# Altium PCB PCB1.PcbDoc
Units mm, origin at the board's own origin, x right, y up, seen from the top; angles counter-clockwise.
Board outline 40.08 x 17.47 mm, 2 copper layers (Top Layer, Bottom Layer); 10 components, 17 nets, 82 pads, 42 vias.
Unrouted connection lines stored in the file: 19.
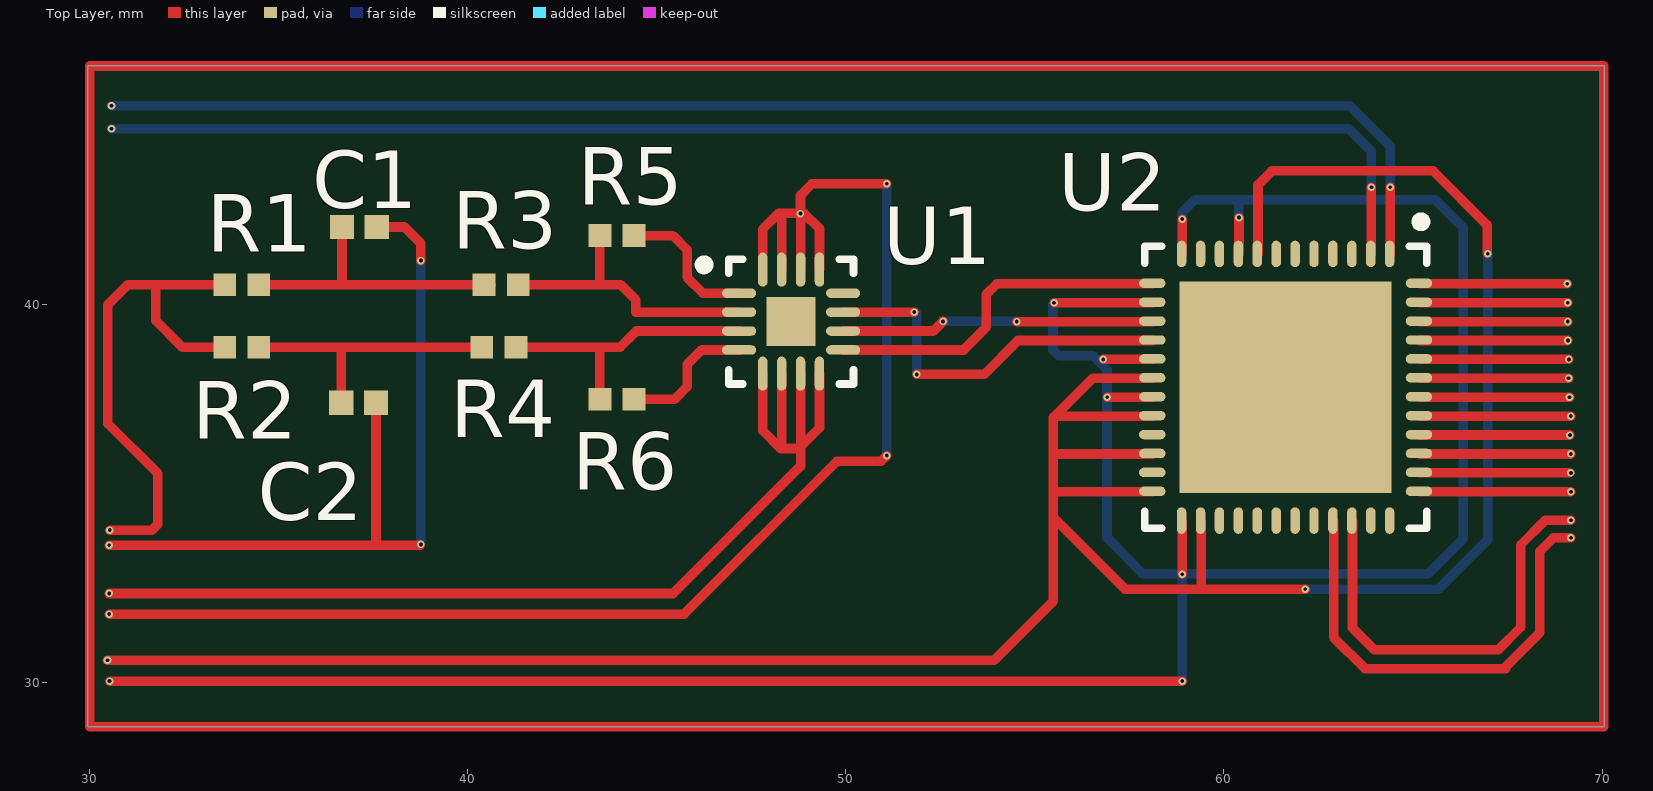
[diagram p0: Top Layer view]
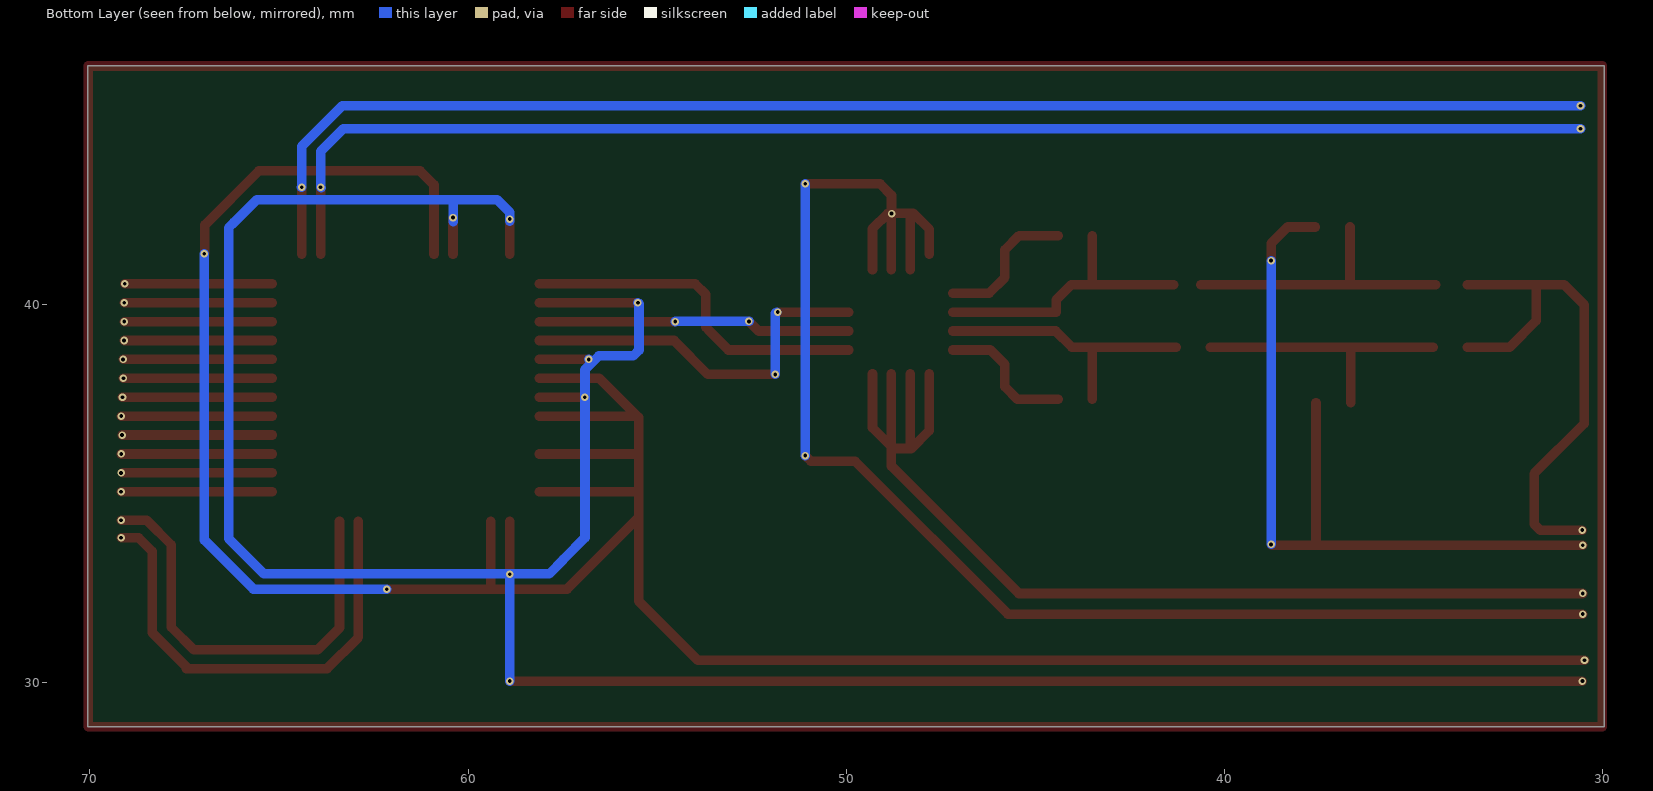
[diagram p1: Bottom Layer view, seen from below]

## Layer stack, top to bottom
Top Solder: solder mask 0.0102, Solder Resist, Dk 3.5
Top Layer: signal copper 0.0356
Dielectric 1: dielectric 0.32, FR-4, Dk 4.8
Bottom Layer: signal copper 0.0356
Bottom Solder: solder mask 0.0102, Solder Resist, Dk 3.5

## Board outline
29.972,28.829 29.972,46.295 70.052,46.295 70.052,28.829

## Design rules (kind name [scope] priority, off if disabled: settings)
Clearance [All] p1: gap=0.254 ignorepadtopadclearanceinfootprint=FALSE
PolygonConnect [All] p1: connectstyle=Relief reliefconductorwidth=0.254 reliefentries=4 polygonreliefangle="90 Angle" airgapwidth=0.254
RoutingVias [All] p1: holewidth=0.711 width=1.27 viastyle="Through Hole" minholewidth=0.711 minwidth=1.27 maxholewidth=0.711 maxwidth=1.27
SolderMaskExpansion [All] p1: expansion=0.102 istentingtop=FALSE
SupplyNets "Schematic Supply Nets_1" [InNet('GND')] p1: voltage=0.000
Width [All] p1: maxlimit=0.254 minlimit=0.254 preferedwidth=0.254
30 further rules are at their usual default settings.

## Classes and differential pairs
component class Sheet2: C1 C2 R1 R2 R3 R4 R5 R6

## Components (designator, comment, footprint, x,y, rotation, side; value= is the part's Value field where it differs from the comment)
C1 "0.1" CAP 37.149,42.038 r0 top
C2 "0.1" CAP 37.127,37.393 r0 top
R1 "50" RES 34.036,40.513 r0 top
R2 "160" RES 34.036,38.862 r0 top
R3 "20k" RES 40.894,40.513 r0 top
R4 "20k" RES 40.836,38.862 r0 top
R5 "10k" RES 43.956,41.81 r0 top
R6 "10k" RES 43.956,37.482 r0 top
U2 "U2" ADS61B49 61.634,37.8 r270 top (schematic designator *3)
? "U1" ADA4932-1 48.561,39.537 r0 top

## Footprints (in the part's own frame and the unit in brackets; to place one, negate y for a bottom-side part, rotate by r counter-clockwise, add the part's x,y. Pads: shape width x height; smd on the part's side, far side on the other; paste and mask are expansions set on the pad)
ADA4932-1 [mm] "QFN, 16-Leads, Body 3,00x3,00mm, Pitch 0,50mm, Thermal Pad 1,50x1,50mm, IPC Medium Density"
  oval 0.9x0.25 smd: 1(-1.375,0.75) 2(-1.375,0.25) 3(-1.375,-0.25) 4(-1.375,-0.75) 9(1.375,-0.75) 10(1.375,-0.25) 11(1.375,0.25) 12(1.375,0.75)
  oval 0.25x0.9 smd: 5(-0.75,-1.375) 6(-0.25,-1.375) 7(0.25,-1.375) 8(0.75,-1.375) 13(0.75,1.375) 14(0.25,1.375) 15(-0.25,1.375) 16(-0.75,1.375)
  rect 1.3x1.3 smd: 17(0,0)
  silkscreen extent -2.42,-1.65 1.65,1.65, body extent -1.64,-1.52 1.4,1.52, height 1
ADS61B49 [mm]
  oval 0.7x0.25 smd: 1(-3.525,2.75) 2(-3.525,2.25) 3(-3.525,1.75) 4(-3.525,1.25) 5(-3.525,0.75) 6(-3.525,0.25) 7(-3.525,-0.25) 8(-3.525,-0.75) 9(-3.525,-1.25) 10(-3.525,-1.75) 11(-3.525,-2.25) 12(-3.525,-2.75) 25(3.525,-2.75) 26(3.525,-2.25) 27(3.525,-1.75) 28(3.525,-1.25) 29(3.525,-0.75) 30(3.525,-0.25) 31(3.525,0.25) 32(3.525,0.75) 33(3.525,1.25) 34(3.525,1.75) 35(3.525,2.25) 36(3.525,2.75)
  oval 0.25x0.7 smd: 13(-2.75,-3.525) 14(-2.25,-3.525) 15(-1.75,-3.525) 16(-1.25,-3.525) 17(-0.75,-3.525) 18(-0.25,-3.525) 19(0.25,-3.525) 20(0.75,-3.525) 21(1.25,-3.525) 22(1.75,-3.525) 23(2.25,-3.525) 24(2.75,-3.525) 37(2.75,3.525) 38(2.25,3.525) 39(1.75,3.525) 40(1.25,3.525) 41(0.75,3.525) 42(0.25,3.525) 43(-0.25,3.525) 44(-0.75,3.525) 45(-1.25,3.525) 46(-1.75,3.525) 47(-2.25,3.525) 48(-2.75,3.525)
  rect 5.6x5.6 smd: 49(0,0)
  silkscreen extent -4.5,-3.73 3.73,3.72, body extent -3.62,-3.62 3.62,3.62, height 1
CAP [mm] "Chip Capacitor, 2-Leads, Body 1,00x0,50mm, IPC Medium Density"
  rect 0.64x0.64 smd: 1(-0.46,0) 2(0.46,0)
  body extent -0.55,-0.3 0.55,0.3, height 0.6
RES [mm] "Chip Resistor, 2-Leads, Body 1,00x0,50mm, IPC Medium Density"
  rect 0.6x0.6 smd: 1(-0.45,0) 2(0.45,0)
  body extent -0.55,-0.3 0.55,0.3, height 0.6

## Part data
C1 C2: library part C
R1 R2 R3 R4 R5 R6: library part R
U2: library part ADC
?: library part OA

## Via types
v1: diameter 0.2/0.2 (per signal layer), hole 0.1, Top Layer to Bottom Layer, 22 vias
v2: diameter 0.2, hole 0.1, Top Layer to Bottom Layer, 20 vias

## Nets (pads, with @x,y where several pads share a name; then routed paths per layer and width w, separated by ;. In a path a pad name is that pad's centre, name@x,y a point inside that pad or via, vN(x,y) a via of type N, cw(c..) or ccw(c..) an arc to the next point about the centre after c; other vN are vias at no path point)
GND: 
Net*3_1: U2.1
Net*3_2: U2.2
Net*3_8: U2.8 U2.18 U2.20 U2.22 U2.24 U2.26
Net*3_9: U2.9 U2.12 U2.14 U2.17 U2.19 U2.25
Net*3_13: ?.9 U2.13
Net*3_15: ?.10 U2.15
Net*3_16: ?.11 U2.16
Net_1: ?.1
Net_2: ?.2
Net_3: ?.3
Net_4: ?.4
Net_5: ?.5 ?.6 ?.7 ?.8
Net_13: ?.13 ?.14 ?.15 ?.16
NetC1: 
NetC2: 
NetR1: 
pads on no net: ?.12 ?.17 C1.1 C1.2 C2.1 C2.2 R1.1 R1.2 R2.1 R2.2 R3.1 R3.2 R4.1 R4.2 R5.1 R5.2 R6.1 R6.2 U2.3 U2.4 U2.5 U2.6 U2.7 U2.10 U2.11 U2.21 U2.23 U2.27 U2.28 U2.29 U2.30 U2.31 U2.32 U2.33 U2.34 U2.35 U2.36 U2.37 U2.38 U2.39 U2.40 U2.41 U2.42 U2.43 U2.44 U2.45 U2.46 U2.47 U2.48 U2.49
copper on no net: | length 575.6
  Top Layer w0.254: v1(30.489,30.586) 53.934,30.586 55.494,32.146 55.494,34.357 ; v1(30.533,31.803) 45.732,31.803 49.773,35.844 50.943,35.844 v2(51.092,35.993) ; v1(30.533,32.349) 45.441,32.349 48.811,35.719 48.811,36.23 48.811,38.162 ; v1(30.536,33.625) 37.587,33.625 ; v1(30.543,30.032) v2(58.901,30.032) ; v1(30.547,34.025) 31.662,34.025 31.818,34.18 31.818,35.519 30.5,36.836 30.5,39.983 31.029,40.512 31.766,40.512 ; 33.585,40.512 31.766,40.512 ; 33.586,38.862 32.462,38.862 31.766,39.559 31.766,40.512 ; 34.417,40.513 40.629,40.513 ; 34.486,38.862 40.386,38.862 ; 36.667,37.393 36.667,38.843 ; 36.689,40.534 36.689,42.038 ; 37.587,37.393 37.587,33.625 ; 37.609,42.038 38.338,42.038 38.773,41.603 v2(38.773,41.149) ; v2@38.752,33.625 37.587,33.625 ; 41.286,38.862 43.473,38.862 44.043,38.862 44.468,39.287 47.186,39.287 ; 41.344,40.513 43.417,40.513 43.724,40.513 ; 43.506,37.482 43.506,38.829 ; 43.506,40.578 43.506,41.81 ; 43.571,40.513 43.724,40.513 ; 44.406,37.482 45.478,37.482 45.81,37.814 45.81,38.401 46.195,38.787 47.186,38.787 ; 44.406,41.81 45.435,41.81 45.81,41.435 45.81,40.708 46.231,40.287 47.186,40.287 ; 47.186,39.787 44.451,39.787 44.451,40.117 44.055,40.513 43.724,40.513 ; 47.811,38.162 47.811,36.654 48.284,36.181 48.761,36.181 49.311,36.73 49.311,38.162 ; 47.811,41.317 47.811,41.979 48.232,42.4 48.903,42.4 49.311,41.992 49.311,40.912 ; 48.311,36.207 48.311,38.162 ; 48.311,40.912 48.311,42.349 ; v2(48.808,42.392) 48.808,42.875 49.112,43.18 v2(51.086,43.18) ; 48.811,40.912 v2@48.811,42.327 ; 49.936,38.787 50.935,38.787 53.121,38.787 53.657,39.323 ; 49.936,39.287 50.915,39.287 52.322,39.287 v2(52.577,39.542) ; 49.936,39.787 50.915,39.787 v2(51.817,39.787) ; v2(51.881,38.14) 53.667,38.14 54.551,39.023 54.551,39.038 57.28,39.038 58.126,39.038 ; 53.723,39.389 53.723,40.261 53.999,40.538 57.207,40.538 57.317,40.538 58.126,40.538 ; v2(54.524,39.538) 57.317,39.538 58.126,39.538 ; 55.494,35.038 56.514,35.038 57.291,35.038 58.126,35.038 ; 55.494,36.038 56.531,36.038 57.291,36.038 58.126,36.038 ; v2(55.514,40.038) 57.317,40.038 58.126,40.038 ; 55.531,37.038 56.531,37.038 57.291,37.038 58.126,37.038 ; v2(56.815,38.538) 57.28,38.538 58.126,38.538 ; v2(56.916,37.538) 57.291,37.538 58.126,37.538 ; 57.401,32.462 57.389,32.462 ; 58.126,38.038 57.291,38.038 56.531,38.038 55.494,37.001 55.494,34.357 ; v2(58.901,32.858) 58.901,33.448 58.901,34.263 ; 58.901,41.313 v2(58.901,42.246) ; 59.401,34.263 59.401,33.448 59.401,32.462 ; 60.401,41.313 v2(60.401,42.286) ; 60.903,41.314 60.903,42.594 60.903,43.153 61.273,43.523 65.541,43.523 65.541,43.512 66.96,42.092 v2@66.96,41.349 ; v2(62.152,32.462) 59.401,32.462 ; 62.901,34.263 62.901,31.189 63.73,30.361 67.226,30.361 67.445,30.361 67.445,30.407 68.357,31.318 68.357,33.465 68.715,33.822 v1(69.177,33.822) ; 63.401,34.263 63.401,31.439 63.984,30.857 67.249,30.857 67.849,31.457 67.849,33.638 68.496,34.284 v1(69.177,34.284) ; 63.901,41.313 63.901,42.112 v2(63.901,43.091) ; 64.401,41.313 64.401,42.112 v2(64.401,43.091) ; 65.176,35.038 v1(69.177,35.038) ; 65.176,35.538 v1@69.135,35.538 ; 65.176,36.038 v1(69.173,36.038) ; 65.176,36.538 v1(69.15,36.538) ; 65.176,37.038 v1(69.171,37.038) ; 65.176,37.538 v1(69.139,37.538) ; 65.176,38.038 v1(69.115,38.038) ; 65.176,38.538 v1(69.123,38.538) ; 65.176,39.038 v1(69.096,39.038) ; 65.176,39.538 v1(69.091,39.538) ; 65.176,40.038 v1(69.091,40.038) ; 65.176,40.538 v1(69.081,40.538) ; 55.494,34.357 57.389,32.462 ; 57.389,32.462 59.401,32.462 ; 30.021,28.829 70.04,28.829 70.04,46.295 30.021,46.295 30.021,28.829
  Bottom Layer w0.254: v1(30.595,44.634) 63.306,44.634 63.901,44.039 63.901,43.86 v2(63.901,43.091) v2@63.888,43.077 ; v1(30.595,45.241) 63.331,45.241 64.401,44.171 v2(64.401,43.091) v2@64.408,43.084 ; v2(38.773,33.646) v2(38.773,41.149) ; v2@51.086,35.988 v2(51.086,43.18) ; v2@51.847,39.787 51.881,39.753 v2(51.881,38.14) ; v2(52.577,39.542) 54.519,39.542 v2(54.524,39.538) ; v2(55.514,40.038) 55.485,40.009 55.485,38.782 55.635,38.632 56.549,38.632 56.913,38.267 56.913,38.264 56.913,38.214 56.913,33.823 57.482,33.254 ; 56.731,38.453 v2(56.815,38.538) ; v2@56.913,37.541 v2(56.916,37.538) ; 57.482,33.242 57.853,32.871 58.888,32.871 58.891,32.868 65.404,32.868 66.333,33.798 66.333,42.017 66.194,42.156 65.587,42.763 59.48,42.763 59.239,42.763 58.898,42.421 v2@58.898,42.194 ; v2@58.898,42.243 v2(58.901,42.246) ; v2@58.899,32.861 v2(58.901,32.858) v2(58.901,30.032) ; 60.39,42.181 60.39,42.763 ; v2(62.152,32.462) 63.953,32.462 65.388,32.462 65.676,32.462 66.976,33.761 v2(66.976,41.333)
  other v1: 69.177,35.538

## Silkscreen, mask and mechanical layers (free items; w line width, h text height)
Top Overlay:
  text "U1" at 50.995,41.058 h1.52